# Altium PCB PCB2.PcbDoc (part 2 of 3)
Units mm, origin at the board's own origin, x right, y up, seen from the top; angles counter-clockwise.
Board outline 51.19 x 48.9 mm, 6 copper layers (Top Layer, Internal Plane 1, Signal Layer 3, Signal Layer 2, Internal Plane 2, Bottom Layer), stack 1.58 mm thick; 165 components, 90 nets, 480 pads, 1318 vias.
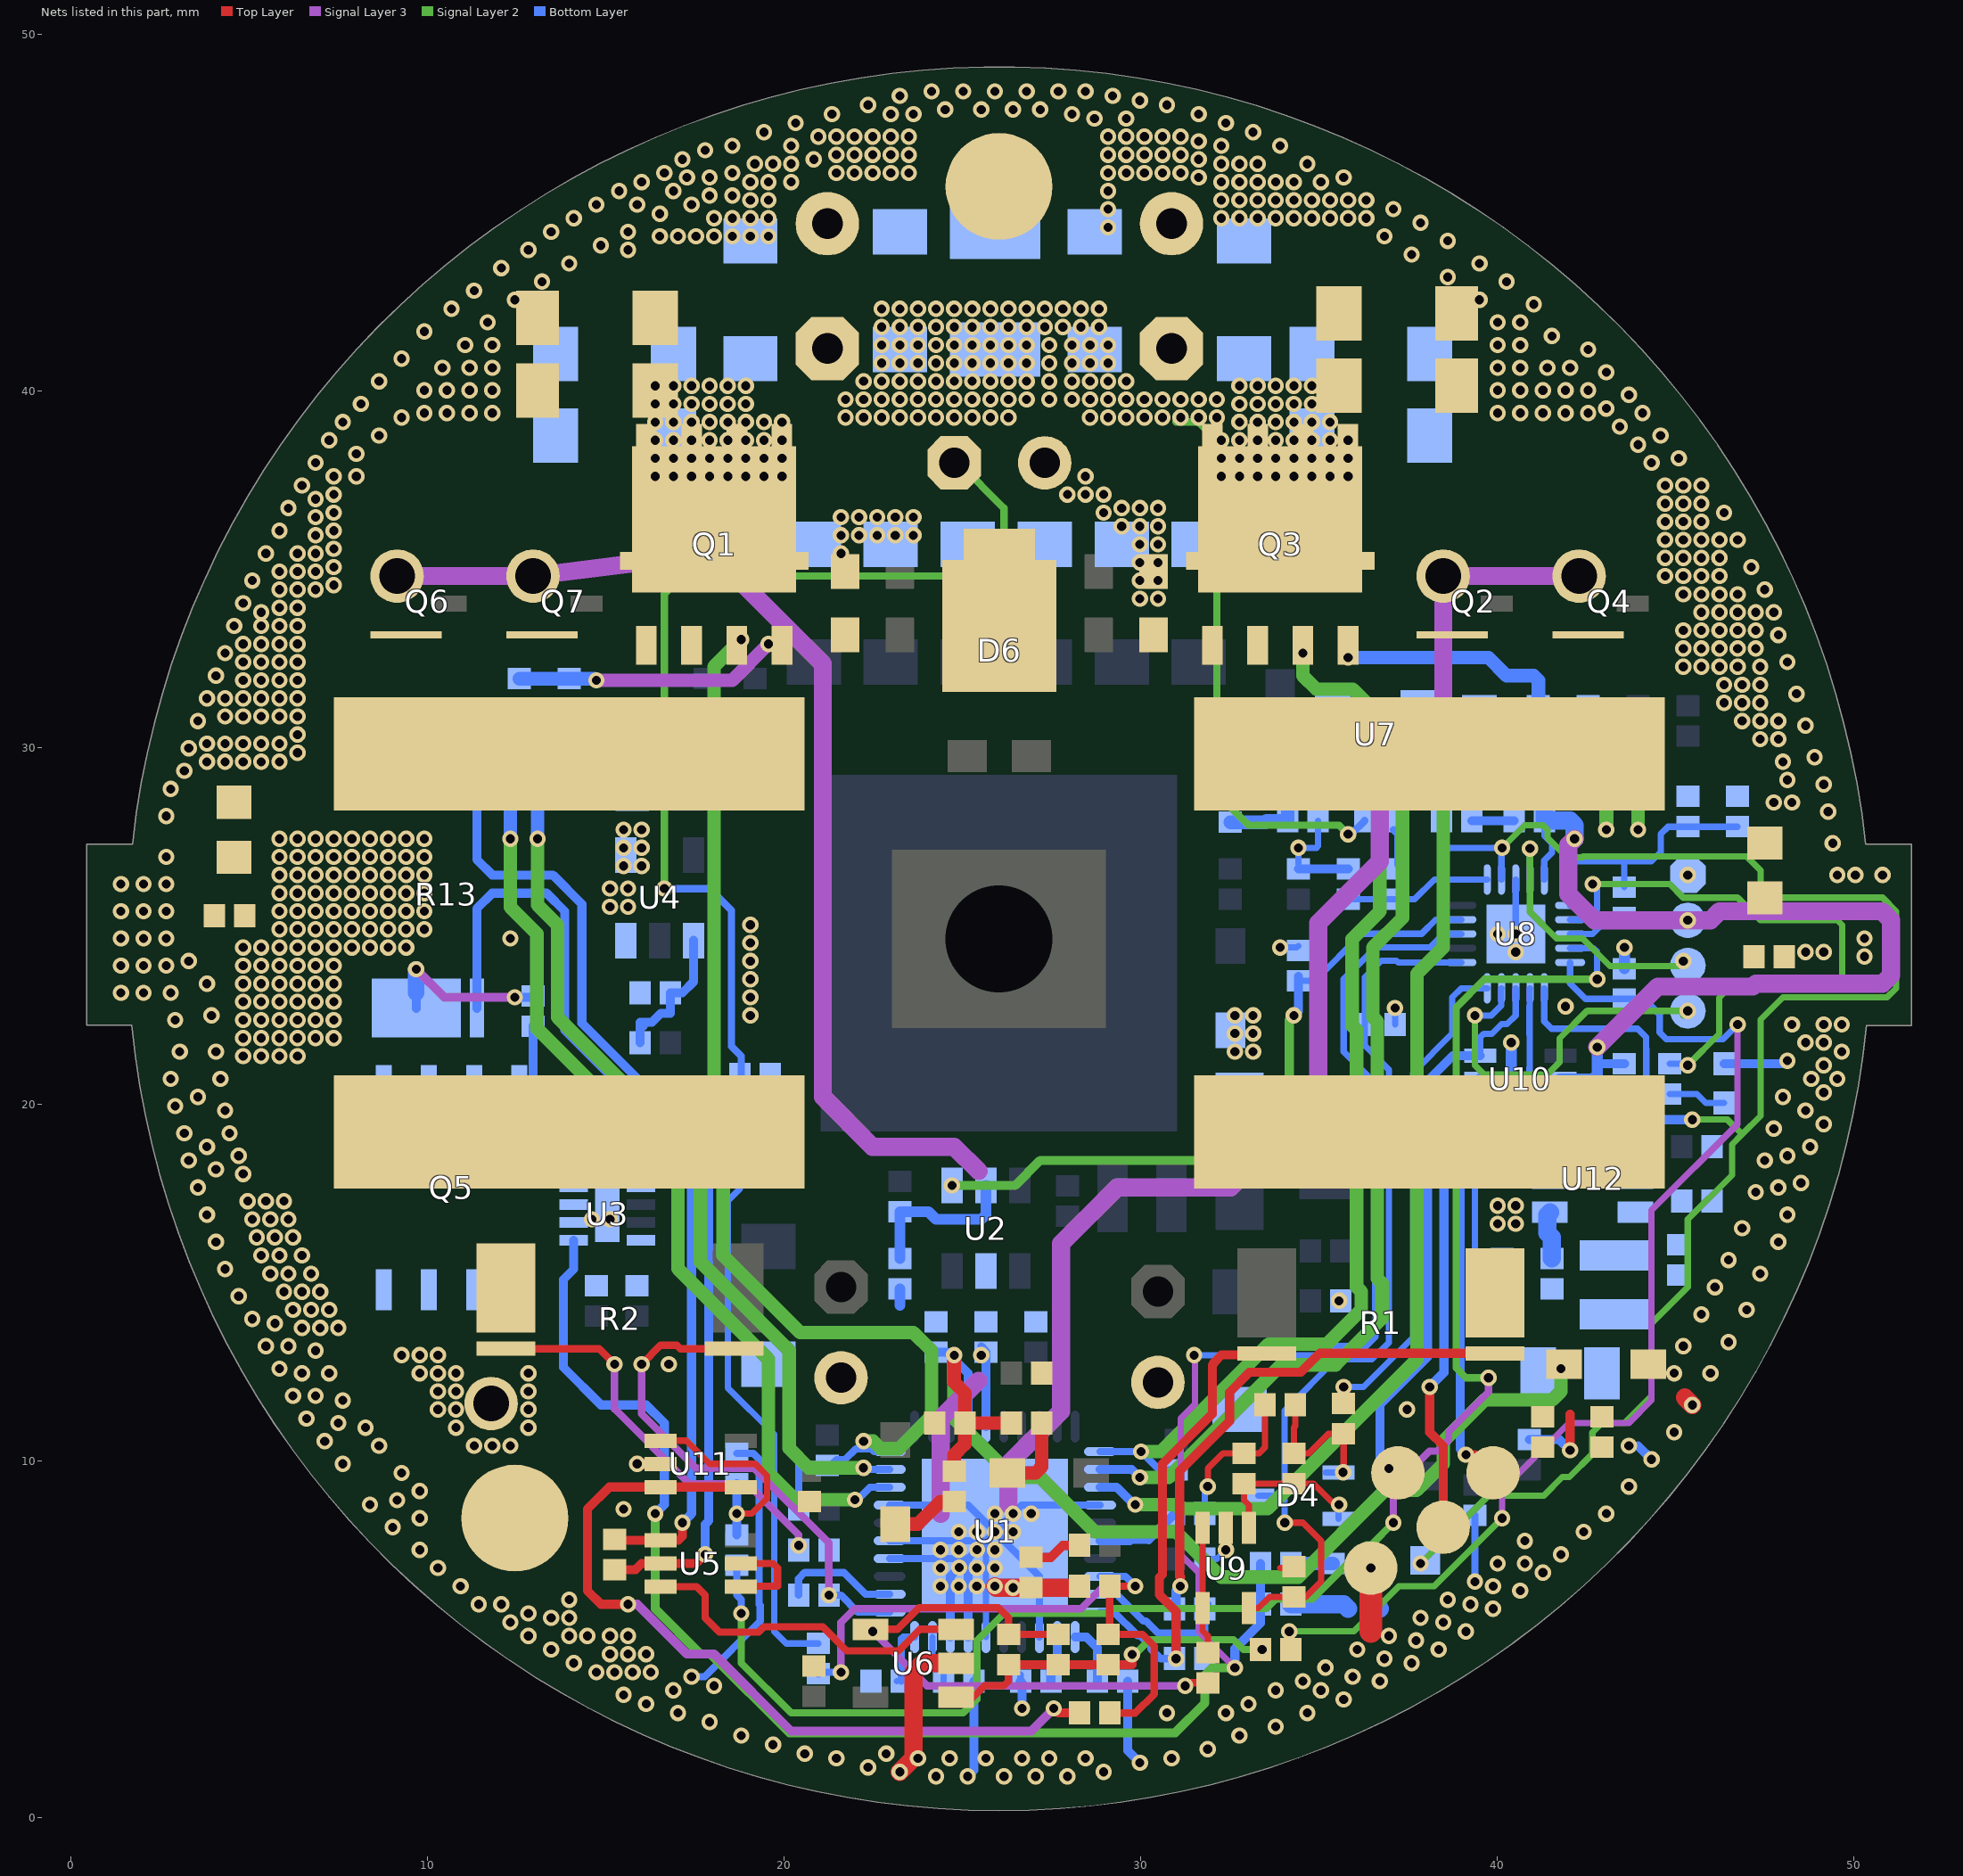
[diagram p6: the nets of this part, all layers, seen from the top]

## Via types
v1: diameter 0.457, hole 0.254, Top Layer to Bottom Layer, tented both sides, 1318 vias

## Nets (pads, with @x,y where several pads share a name; then routed paths per layer and width w, separated by ;. In a path a pad name is that pad's centre, name@x,y a point inside that pad or via, vN(x,y) a via of type N, cw(c..) or ccw(c..) an arc to the next point about the centre after c; other vN are vias at no path point) (continued)
DCDCRUN: D8.2 R18.1 U8.2 U12.4 | length 46.9
  Signal Layer 2 w0.178: v1(37.846,7.112) 39.751,9.017 41.305,9.017 41.823,9.534 42.016,9.534 42.663,10.181 42.663,10.786 42.926,11.049 43.561,11.049 44.323,11.811 44.323,13.843 45.339,14.859 45.339,16.764 46.579,18.004 46.579,18.863 46.863,19.147 ; v1@40.132,27.305 v1(40.132,27.178) 40.767,27.813 41.275,27.813 41.402,27.686 41.402,27.462 41.95,26.915 42.378,26.915 42.397,26.933 46.99,26.933 47.38,26.543 47.38,26.026 47.625,25.781 50.8,25.781 51.181,25.4 51.181,23.241 50.927,22.987 48.006,22.987 47.38,22.361 47.38,19.664 46.863,19.147 ; v1(45.466,19.558) 46.452,19.558 46.863,19.147
  Bottom Layer w0.178: R18.1@38.437,28.067 38.437,27.349 38.608,27.178 v1(40.132,27.178) 40.113,27.159 U8.2@40.113,26.29
  Bottom Layer w0.254: U12.4@43.872,18.857 43.872,19.361 44.069,19.558 v1(45.466,19.558)
DCEN: R19.2 U2.4 U8.19 | length 20
  Signal Layer 2 w0.254: v1(24.704,17.71) 26.473,17.71 27.178,18.415 33.655,18.415 34.163,18.923 34.163,22.352 v1(34.29,22.479)
  Bottom Layer w0.178: R19.2@34.417,23.451 34.881,23.451 36.198,24.768 37.875,24.768 38.272,25.165 U8.19@38.988,25.165
  Bottom Layer w0.254: v1(34.29,22.479) 34.417,22.606 R19.2@34.417,23.578
DRVCC: C15.2 C61.2 C63.2 C64.2 C71.2 C75.2 D10.2 L4.1 R48.2 R49.1 R50.2 R53.1 U1.24 | length 34.8
  Top Layer w0.254: v1(42.037,10.287) 42.037,11.303
  Top Layer w0.381: R48.2@24.765,9.696 24.765,10.16 25.063,10.458 C71.2@25.063,11.049 ; v1(24.765,12.954) 24.765,12.192 25.063,11.894 C71.2@25.063,11.049 ; R49.1@26.372,11.049 C71.2@25.063,11.049
  Signal Layer 2 w0.381: v1(24.765,12.954) 24.765,11.176 26.416,9.525 27.178,9.525 28.702,8.001 30.988,8.001 32.258,6.731 34.417,6.731 36.846,9.16 37.735,9.16 38.481,9.906 38.481,10.541 39.64,11.7 41.545,11.7 41.783,11.938 v1(41.783,12.573)
  Bottom Layer w0.178: 40.132,13.589 R50.2@40.132,14.815
  Bottom Layer w0.254: C61.2@24.257,13.037 24.567,13.037 25.158,12.446 U1.24@25.158,10.951 ; R53.1@40.894,10.585 41.739,10.585 v1(42.037,10.287)
DRVIN: C68.1 FB3.1 U12.5
DSCK: pad.0 U8.14 | length 10.1
  Signal Layer 2 w0.178: v1(39.37,22.479) 39.37,21.082 39.624,20.828 41.402,20.828 41.742,21.168 41.742,21.834 42.515,22.606 v1(45.339,22.606) v1@45.212,22.479
  Bottom Layer w0.178: v1(39.37,22.479) 39.827,22.479 40.102,22.754 40.102,23.229 U8.14@40.113,23.24
DSDA: pad.2@45.339,23.876 U8.4 | length 7.6
  Signal Layer 2 w0.178: v1(40.913,27.159) 40.913,25.381 41.656,24.638 42.388,24.638 43.159,23.867 45.076,23.867 v1(45.212,24.003)
  Bottom Layer w0.178: U8.4@40.913,26.29 v1(40.913,27.159)
DTCA: R39.1 U1.9 | length 1.4
  Bottom Layer w0.178: U1.9@24.158,5.051 24.158,4.544 24.467,4.235 R39.1@24.467,3.81
DTCB: R40.1 U1.10 | length 1.6
  Bottom Layer w0.203: R40.1@23.285,3.81 23.285,4.998 23.338,5.051 U1.10@23.658,5.051
FSW: R35.1 U1.1 | length 1.7
  Bottom Layer w0.254: U1.1@28.158,5.051 28.477,5.051 28.785,4.743 R35.1@28.785,3.81
GH1: Q3.4 R9.2 R10.2 | length 7.7
  Bottom Layer w0.381: v1(35.814,32.512) 39.751,32.512 40.259,32.004 41.021,32.004 41.148,31.877 R9.2@41.148,31.159 R10.2@42.545,31.159
GH2: Q1.4 R46.2 R47.2 | length 7.9
  Top Layer w0.381: v1(19.558,32.893) 19.583,32.868 Q1.4@20.026,32.868
  Signal Layer 3 w0.381: v1(14.732,31.877) 18.542,31.877 v1(19.558,32.893)
  Bottom Layer w0.381: R46.2@12.573,31.921 R47.2@13.97,31.921 14.688,31.921 v1(14.732,31.877)
GLED: pad.4@38.481,8.128 U8.12 U10.1 | length 17.3
  Top Layer w0.254: v1(38.1,12.065) 38.1,10.795 38.481,10.414 pad.4@38.481,8.128
  Bottom Layer w0.178: U10.1@39.515,20.051 40.371,20.051 40.899,20.579 40.899,21.021 40.903,21.025 40.903,21.931 40.899,21.936 40.899,22.751 40.902,22.754 40.902,23.229 U8.12@40.913,23.24
  Bottom Layer w0.254: v1(38.1,12.065) 38.5,12.465 38.5,19.577 38.974,20.051 U10.1@39.515,20.051
GND: C1.2 C2.2 C3.2 C4.2 C6.1 C8.1 C9.1 C11.1 C12.2 C13.1 C14.1 C15.1 C16.2 C17.1 C18.1 C19.1 C20.1 C21.1 C22.1 C23.1 C24.1 C25.1 C26.1 C27.1 C28.1 C29.1 C30.1 C31.1 C32.1 C34.1 C35.1 C36.1 C38.2 C39.1 C40.1 C41.1 C42.1 C43.1 C44.1 C45.1 C46.1 C47.1 C49.1 C51.1 C52.1 C53.1 C54.1 C55.2 C56.1 C57.1 C58.1 C59.2 C60.2 C61.1 C63.1 C64.1 C65.1 C66.1 C67.1 C68.2 C71.1 C72.1 C73.1 C74.2 C75.1 D3.1 D5.K D9.K D10.1 pad.2@9.144,34.798 pad.2@12.954,34.798 pad.2@38.481,34.798 pad.2@42.291,34.798 pad.2@45.339,26.416 pad.4@36.449,6.985 Q2.1 Q4.1 Q6.1 Q7.1 R5.2 R11.1 R13.0 R18.2 R19.1 R22.1 R23.1 R26.1 R30.1 R35.2 R39.2 R40.2 R51.1 R52.1 R55.1 U1.3 U1.6 U1.7 U1.8 U1.14 U1.15 U1.17 U1.34 U1.41 U2.2 U3.2 U3.3 U3.8 U3.9 U4.3 U4.4 U5.1 U5.2 U6.2 U7.3 U7.4 U8.3 U8.21 U9.2 U10.2 U11.2 U12.2 | length 144.3
  Top Layer w0.178: v1(31.877,9.271) 31.877,9.779 32.302,10.204 C45.1@32.893,10.204 33.318,10.204 33.484,10.37 C44.1@33.484,11.557 ; v1(32.385,7.493) U9.2@32.385,8.11 ; 33.909,6.985 34.246,6.985 C43.1@34.29,7.029
  Top Layer w0.203: U5.1@18.778,6.462 18.793,6.477 19.812,6.477 19.812,6.985 19.685,7.112 U5.2@18.778,7.112
  Top Layer w0.305: v1(15.875,9.906) U11.2@16.528,9.906
  Top Layer w0.508: v1(23.241,1.27) 23.622,1.651 23.622,4.064 23.876,4.318 U6.2@24.822,4.318 ; v1(25.908,6.477) 25.952,6.433 v1(26.416,6.433) C31.1@26.924,6.433 28.233,6.433 R11.1@28.277,6.477 ; 45.256,11.767 v1(45.466,11.557)
  Top Layer w0.635: 36.449,5.207 v1(36.449,6.985)
  Signal Layer 3 w0.508: pad.2@9.144,34.798 pad.2@12.954,34.798 17.983,35.433 21.082,32.334 21.082,20.193 22.479,18.796 24.765,18.796 25.448,18.113 ; 24.384,8.509 24.384,11.176 25.448,12.24 ; 26.289,8.763 26.289,9.906 27.765,11.382 27.765,16.081 29.337,17.653 32.512,17.653 34.973,20.114 34.973,25.067 36.703,26.797 36.703,28.956 38.481,30.734 pad.2@38.481,34.798 pad.2@42.291,34.798
  Bottom Layer w0.178: U1.6@25.658,5.051 U1.41@25.658,7.751 ; C17.1@31.794,7.239 32.131,7.239 v1(32.385,7.493) ; C18.1@31.794,8.509 31.794,9.188 v1(31.877,9.271) ; v1(33.909,24.384) 34.373,24.384 R19.1@34.417,24.428 ; R22.1@34.417,26.714 v1(34.417,27.178) 34.925,27.178 34.969,27.222 C40.1@34.969,27.94 ; R26.1@37.128,22.225 v1(37.128,22.689) ; v1(40.513,24.765) U8.3@40.513,26.29
  Bottom Layer w0.203: v1(17.399,3.937) 17.768,3.937 19.326,5.495 19.326,5.935 19.296,5.965 19.296,10.041 19.133,10.204 C56.1@18.669,10.204 ; C49.1@20.403,8.636 20.403,9.862 20.447,9.906 ; U1.14@22.958,7.251 25.158,7.251 v1(25.408,7.501) U1.41@25.658,7.751 ; U1.15@22.958,7.751 U1.41@25.658,7.751 ; U1.17@22.958,8.751 25.158,8.751 v1(25.908,8.001) ; U1.3@27.158,5.051 27.158,6.751 v1(25.908,8.001) ; U1.34@28.858,8.751 26.658,8.751 v1(26.416,8.509) v1(25.908,8.001) ; v1(39.37,6.604) R52.1@39.37,8.465 ; U1.41@25.658,7.751 v1(25.908,8.001)
  Bottom Layer w0.254: v1@22.308,1.441 v1(22.352,1.397) ; U1.8@24.658,5.051 24.658,6.751 U1.41@25.158,7.251 ; v1(25.146,1.143) 25.317,1.314 R39.2@25.317,3.81 ; U1.7@25.158,5.051 U1.41@25.158,6.985 ; R35.2@29.635,3.81 29.635,1.861 v1(29.972,1.524) ; R22.1@34.417,26.587 R23.1@35.814,26.587 ; R18.2@39.287,27.94 C41.1@40.469,27.94 ; 43.942,10.414 v1(44.323,10.033) ; D5.K@46.355,21.124 48.048,21.124 v1(48.133,21.209)
  Bottom Layer w0.305: C2.2@21.504,12.614 C2.2@21.885,12.614 ; 23.241,14.351 C6.1@23.241,14.815 ; U10.2@39.515,20.701 40.259,20.701 40.386,20.828 v1(40.386,21.717) ; C46.1@43.561,23.793 v1(43.561,24.384)
  Bottom Layer w0.508: R55.1@34.207,5.969 35.687,5.969 35.814,5.842 ; D9.K@36.491,7.112 36.491,6.054 36.703,5.842
  other v1: 24.257,1.143 26.162,1.143 27.051,1.143 27.94,1.143 28.956,1.27 21.463,1.651 23.749,1.651 24.638,1.651 25.654,1.651 26.67,1.651 27.432,1.651 28.448,1.651 30.861,1.651 20.574,1.778 22.86,1.778 31.877,1.905 19.685,2.032 18.796,2.286 32.766,2.286 33.782,2.54 17.907,2.667 17.018,2.921 30.734,2.921 32.385,2.921 34.671,2.921 16.129,3.175 33.02,3.175 35.687,3.302 15.494,3.429 16.891,3.556 33.782,3.556 35.052,3.556 18.034,3.683 34.544,3.81 36.703,3.81 35.941,3.937 14.732,4.064 15.24,4.064 15.748,4.064 16.256,4.064 35.179,4.191 14.097,4.318 37.592,4.318 36.83,4.445 15.113,4.572 15.621,4.572 16.129,4.572 13.462,4.699 36.068,4.699 38.354,4.699 37.719,4.953 12.827,5.08 13.97,5.08 14.478,5.08 15.113,5.08 15.621,5.08 36.957,5.08 39.116,5.207 12.319,5.461 38.481,5.461 13.462,5.588 13.97,5.588 37.846,5.588 12.827,5.715 39.878,5.842 11.43,5.969 12.065,5.969 39.243,5.969 13.97,6.096 38.608,6.096 40.64,6.35 10.922,6.477 24.384,6.477 24.892,6.477 25.4,6.477 39.878,6.477 41.275,6.858 10.287,6.985 24.384,6.985 25.4,6.985 25.908,6.985 24.908,7.001 40.005,7.112 40.767,7.112 41.783,7.366 9.779,7.493 24.384,7.493 24.892,7.493 25.908,7.493 40.767,7.747 24.892,8.001 25.4,8.001 26.416,8.001 42.418,8.001 9.017,8.128 9.779,8.382 25.908,8.509 26.924,8.509 43.053,8.509 15.494,8.636 8.382,8.763 9.144,8.89 9.779,9.144 43.688,9.271 9.271,9.652 7.62,9.906 8.636,10.414 43.688,10.414 7.112,10.541 44.958,10.795 8.255,10.922 7.493,11.049 6.604,11.176 37.465,11.43 7.62,11.684 6.223,11.811 6.858,11.811 6.477,12.446 7.239,12.446 44.958,12.446 45.974,12.446 5.842,12.573 16.764,12.7 6.858,13.081 5.461,13.208 6.096,13.208 45.212,13.208 46.482,13.318 6.477,13.716 6.985,13.716 7.493,13.716 5.715,13.843 5.08,13.97 45.72,14.097 6.223,14.224 6.731,14.224 7.239,14.224 46.99,14.224 35.56,14.478 4.699,14.605 5.969,14.732 6.477,14.732 6.985,14.732 46.101,14.859 5.588,15.24 6.096,15.24 6.731,15.24 47.371,15.24 4.318,15.367 46.482,15.621 5.334,15.748 5.842,15.748 6.477,15.748 4.064,16.129 47.879,16.129 5.207,16.256 5.715,16.256 6.223,16.256 46.863,16.51 40.005,16.637 40.513,16.637 5.08,16.764 5.588,16.764 6.096,16.764 14.605,16.764 15.113,16.764 3.81,16.891 48.133,16.891 40.005,17.145 40.513,17.145 4.953,17.272 5.461,17.272 5.969,17.272 47.244,17.526 3.556,17.653 47.879,17.653 48.514,17.78 4.826,18.034 4.064,18.161 3.302,18.415 47.498,18.415 4.699,18.542 48.133,18.542 3.81,18.796 48.768,18.796 3.175,19.177 4.445,19.177 47.752,19.304 49.149,19.431 4.318,19.812 48.641,19.812 2.921,19.939 3.556,20.193 48.006,20.193 49.149,20.32 2.794,20.701 4.191,20.701 48.8,20.701 49.53,20.701 49.149,21.082 4.826,21.336 5.334,21.336 5.842,21.336 6.35,21.336 3.048,21.463 4.064,21.463 32.639,21.463 33.147,21.463 49.657,21.463 48.641,21.717 49.149,21.717 4.826,21.844 5.334,21.844 5.842,21.844 6.35,21.844 6.858,21.844 7.366,21.844 32.639,21.971 33.147,21.971 48.26,22.225 49.149,22.225 49.657,22.225 2.921,22.352 4.826,22.352 5.334,22.352 5.842,22.352 6.35,22.352 6.858,22.352 7.366,22.352 3.937,22.479 19.05,22.479 32.639,22.479 33.147,22.479 41.91,22.733 4.826,22.86 5.334,22.86 5.842,22.86 6.35,22.86 6.858,22.86 7.366,22.86 19.05,22.987 1.397,23.114 2.032,23.114 2.794,23.114 3.81,23.368 4.826,23.368 5.334,23.368 5.842,23.368 6.35,23.368 6.858,23.368 7.366,23.368 19.05,23.495 1.397,23.876 2.032,23.876 2.667,23.876 4.826,23.876 5.334,23.876 5.842,23.876 6.35,23.876 6.858,23.876 7.366,23.876 3.302,24.003 19.05,24.003 50.292,24.13 40.513,24.257 48.641,24.257 49.149,24.257 4.826,24.384 5.334,24.384 5.842,24.384 6.35,24.384 6.858,24.384 7.366,24.384 7.874,24.384 8.382,24.384 8.89,24.384 9.398,24.384 19.05,24.511 1.397,24.638 2.032,24.638 2.667,24.638 12.319,24.638 50.292,24.638 40.005,24.765 5.842,24.892 6.35,24.892 6.858,24.892 7.366,24.892 7.874,24.892 8.382,24.892 8.89,24.892 9.398,24.892 9.906,24.892 19.05,25.019 1.397,25.4 2.032,25.4 2.667,25.4 5.842,25.4 6.35,25.4 6.858,25.4 7.366,25.4 7.874,25.4 8.382,25.4 8.89,25.4 9.398,25.4 9.906,25.4 15.113,25.527 15.621,25.527 5.842,25.908 6.35,25.908 6.858,25.908 7.366,25.908 7.874,25.908 8.382,25.908 8.89,25.908 9.398,25.908 9.906,25.908 15.113,26.035 15.621,26.035 1.397,26.162 2.032,26.162 2.667,26.162 5.842,26.416 6.35,26.416 6.858,26.416 7.366,26.416 7.874,26.416 8.382,26.416 8.89,26.416 9.398,26.416 9.906,26.416 45.339,26.416 49.53,26.416 50.038,26.416 50.8,26.416 15.494,26.67 16.002,26.67 2.667,26.924 5.842,26.924 6.35,26.924 6.858,26.924 7.366,26.924 7.874,26.924 8.382,26.924 8.89,26.924 9.398,26.924 9.906,26.924 15.494,27.178 16.002,27.178 49.403,27.305 5.842,27.432 6.35,27.432 6.858,27.432 7.366,27.432 7.874,27.432 8.382,27.432 8.89,27.432 9.398,27.432 9.906,27.432 15.494,27.686 16.002,27.686 2.667,28.067 49.276,28.194 47.752,28.448 48.26,28.448 2.794,28.829 49.149,28.956 48.133,29.083 3.175,29.337 3.81,29.591 4.318,29.591 4.826,29.591 5.334,29.591 5.842,29.591 48.006,29.591 48.895,29.718 6.35,29.845 3.302,29.972 3.81,30.099 4.318,30.099 4.826,30.099 5.334,30.099 5.842,30.099 47.371,30.226 47.879,30.226 6.35,30.353 48.641,30.607 3.556,30.734 46.863,30.734 47.371,30.734 47.879,30.734 4.318,30.861 4.826,30.861 5.334,30.861 5.842,30.861 6.35,30.861 46.355,31.242 46.863,31.242 47.371,31.242 3.81,31.369 4.318,31.369 4.826,31.369 5.334,31.369 5.842,31.369 6.35,31.369 48.387,31.496 46.355,31.75 46.863,31.75 47.371,31.75 4.826,31.877 5.334,31.877 5.842,31.877 6.35,31.877 4.064,32.004 45.212,32.258 45.72,32.258 46.228,32.258 46.736,32.258 47.371,32.258 4.826,32.385 5.334,32.385 5.842,32.385 6.35,32.385 48.133,32.385 4.318,32.639 45.212,32.766 45.72,32.766 46.228,32.766 46.736,32.766 47.244,32.766 4.826,32.893 5.334,32.893 5.842,32.893 6.35,32.893 47.879,33.147 45.212,33.274 45.72,33.274 46.228,33.274 46.736,33.274 47.244,33.274 4.572,33.401 5.334,33.401 5.842,33.401 6.35,33.401 5.334,33.782 45.72,33.782 46.228,33.782 46.736,33.782 47.244,33.782 47.752,33.782 5.842,33.909 6.35,33.909 4.826,34.036 29.972,34.163 30.48,34.163 45.212,34.29 45.72,34.29 46.228,34.29 46.736,34.29 5.842,34.417 6.35,34.417 6.858,34.417 47.498,34.417 7.366,34.544 5.08,34.671 29.972,34.671 30.48,34.671 44.704,34.798 45.212,34.798 45.72,34.798 46.228,34.798 5.842,34.925 6.35,34.925 6.858,34.925 7.366,35.052 47.117,35.052 29.972,35.179 30.48,35.179 44.704,35.306 45.212,35.306 45.72,35.306 46.228,35.306 5.461,35.433 6.35,35.433 6.858,35.433 21.59,35.433 7.366,35.56 29.972,35.687 30.48,35.687 44.704,35.814 45.212,35.814 45.72,35.814 46.228,35.814 46.736,35.814 6.858,35.941 21.59,35.941 22.098,35.941 22.606,35.941 23.114,35.941 23.622,35.941 5.842,36.068 7.366,36.068 29.464,36.195 29.972,36.195 30.48,36.195 44.704,36.322 45.212,36.322 45.72,36.322 6.858,36.449 21.59,36.449 22.098,36.449 22.606,36.449 23.114,36.449 23.622,36.449 7.366,36.576 28.956,36.576 46.355,36.576 6.096,36.703 29.464,36.703 29.972,36.703 30.48,36.703 44.704,36.83 45.212,36.83 45.72,36.83 6.858,36.957 7.366,37.084 27.94,37.084 28.448,37.084 28.956,37.084 6.477,37.338 44.704,37.338 45.212,37.338 45.72,37.338 7.366,37.592 8.001,37.592 28.448,37.592 6.858,37.973 44.323,37.973 45.085,38.1 8.001,38.227 43.942,38.481 7.239,38.608 8.636,38.735 44.577,38.735 43.434,38.989 7.62,39.116 9.271,39.243 9.906,39.37 10.541,39.37 11.176,39.37 11.811,39.37 40.005,39.37 40.64,39.37 41.275,39.37 41.91,39.37 42.545,39.37 44.069,39.37 43.053,39.497 8.128,39.624 43.688,39.878 9.906,40.005 10.541,40.005 11.176,40.005 11.811,40.005 40.005,40.005 40.64,40.005 41.275,40.005 41.91,40.005 42.545,40.005 8.636,40.259 43.053,40.513 10.414,40.64 11.176,40.64 11.811,40.64 40.005,40.64 40.64,40.64 41.402,40.64 42.037,40.64 9.271,40.894 42.545,41.148 11.049,41.275 11.811,41.275 40.005,41.275 40.64,41.275 41.529,41.529 9.906,41.656 11.684,41.91 40.005,41.91 40.64,41.91 10.668,42.291 41.021,42.418 12.446,42.545 39.497,42.545 11.303,42.799 13.208,43.053 40.259,43.053 38.608,43.18 12.065,43.434 13.97,43.561 39.497,43.561 37.592,43.815 12.827,43.942 15.621,43.942 14.859,44.069 38.608,44.196 16.51,44.323 17.018,44.323 17.526,44.323 18.034,44.323 18.542,44.323 19.05,44.323 19.558,44.323 36.83,44.323 13.462,44.45 15.621,44.45 29.083,44.577 37.846,44.704 14.097,44.831 18.034,44.831 18.542,44.831 19.05,44.831 19.558,44.831 32.258,44.831 32.766,44.831 33.274,44.831 33.782,44.831 34.29,44.831 34.798,44.831 35.306,44.831 35.814,44.831 36.322,44.831 16.51,44.958 29.083,45.085 37.084,45.085 14.732,45.212 15.875,45.212 17.399,45.212 19.05,45.339 19.558,45.339 32.258,45.339 32.766,45.339 33.274,45.339 33.782,45.339 34.29,45.339 34.798,45.339 35.306,45.339 35.814,45.339 36.322,45.339 17.907,45.466 18.542,45.466 15.367,45.593 16.891,45.593 29.083,45.593 16.002,45.847 19.05,45.847 19.558,45.847 20.193,45.847 32.258,45.847 32.766,45.847 33.274,45.847 33.782,45.847 34.29,45.847 35.052,45.847 17.272,45.974 17.907,45.974 31.623,45.974 35.687,45.974 16.637,46.101 18.542,46.101 21.463,46.101 21.971,46.101 22.479,46.101 22.987,46.101 23.495,46.101 29.083,46.101 29.591,46.101 30.099,46.101 30.607,46.101 31.115,46.101 19.177,46.355 19.685,46.355 20.193,46.355 32.258,46.355 32.766,46.355 33.274,46.355 34.671,46.355 17.145,46.482 20.828,46.482 31.623,46.482 21.463,46.609 21.971,46.609 22.479,46.609 22.987,46.609 23.495,46.609 29.083,46.609 29.591,46.609 30.099,46.609 30.607,46.609 31.115,46.609 17.78,46.736 18.542,46.863 20.193,46.863 32.258,46.863 33.909,46.863 31.623,46.99 20.955,47.117 21.463,47.117 21.971,47.117 22.479,47.117 22.987,47.117 23.495,47.117 29.083,47.117 29.591,47.117 30.099,47.117 30.607,47.117 31.115,47.117 19.431,47.244 33.147,47.244 20.32,47.498 32.385,47.498 28.702,47.625 29.591,47.625 21.336,47.752 22.987,47.752 23.622,47.752 28.067,47.752 31.623,47.752 24.511,47.879 25.527,47.879 26.416,47.879 27.178,47.879 22.352,48.006 30.734,48.006 29.972,48.133 23.241,48.26 29.21,48.26 24.13,48.387 25.019,48.387 25.908,48.387 26.797,48.387 27.686,48.387 28.448,48.387
HPATH: Q5.1 Q5.2 Q5.3 R12.2 R13.1 | length 4.7
  Signal Layer 3 w0.254: v1(9.679,23.776) 10.468,22.987 v1(12.446,22.987)
  Bottom Layer w0.254: R13.1@9.679,22.682 R13.1@9.679,23.114 ; v1(12.446,22.987) 12.91,22.987 R12.2@12.954,23.031
  Bottom Layer w0.457: R13.1@9.679,23.114 v1(9.679,23.776)
ILED: U5.6 U6.3 | length 9.8
  Top Layer w0.203: U5.6@16.528,6.462 17.541,6.462 17.78,6.223 17.78,5.588 18.183,5.185 19.282,5.185 19.431,5.334 21.082,5.334 21.75,4.666 23.208,4.666 23.81,5.268 U6.3@24.822,5.268
INJ: R14.1 U11.3 U11.4 | length 22.6
  Top Layer w0.254: v1(15.621,5.969) 14.859,5.969 14.478,6.35 14.478,8.636 15.098,9.256 U11.3@16.528,9.256 U11.4@18.778,9.256 ; v1(27.559,3.048) 27.686,2.921 R14.1@28.277,2.921
  Signal Layer 3 w0.254: v1(15.621,5.969) 15.875,5.969 17.272,4.572 18.034,4.572 20.193,2.413 26.924,2.413 v1(27.559,3.048)
INTVCC: C9.2 R38.2 U1.25 | length 3.3
  Bottom Layer w0.178: R38.2@26.626,3.81 R38.2@26.626,3.994
  Bottom Layer w0.203: C9.2@25.527,13.208 25.658,13.077 C9.2@25.658,13.037
  Bottom Layer w0.254: C9.2@25.654,13.037 25.654,10.955 U1.25@25.658,10.951 ; R38.2@26.626,3.81 26.67,3.766 v1(26.67,3.048)
  other v1: 25.527,12.954
IS1_N: R1.3 R7.2 | length 14.7
  Top Layer w0.254: v1(31.106,6.477) 31.106,6.722 31.115,6.731 31.09,6.756 31.09,9.706 32.487,11.103 32.487,11.913 33.052,12.478 34.488,12.478 35.015,13.005 R1.3@39.929,13.005
  Bottom Layer w0.254: R7.2@30.988,5.715 30.988,6.35 31.106,6.468 v1(31.106,6.477)
IS1_P: C7.2 R1.2 U1.40 | length 13.4
  Top Layer w0.254: v1(30.988,4.445) 30.988,5.769 30.522,6.235 30.522,6.719 30.607,6.804 30.607,9.906 32.004,11.303 32.004,12.676 32.052,12.724 32.052,12.748 32.265,12.961 33.484,12.961 R1.2@33.528,13.005
  Bottom Layer w0.208: U1.40@28.858,5.751 29.248,5.751 29.902,5.096 29.974,5.096 30.286,4.784 30.286,4.712 30.554,4.445 v1(30.988,4.445)
IS2_N: R2.2 R43.2 | length 11.4
  Top Layer w0.208: R2.2@12.192,13.132 14.808,13.132 v1(15.24,12.7)
  Signal Layer 3 w0.208: v1(15.24,12.7) 15.24,11.448 17.345,9.342 18.979,9.342 20.403,7.918 v1(20.403,7.62)
  Signal Layer 2 w0.208: v1@15.24,12.668 v1(15.24,12.7)
IS2_P: C48.2 R2.3 U1.11 | length 14.4
  Top Layer w0.208: v1(16.002,12.7) 16.535,13.233 16.985,13.233 17.085,13.132 R2.3@18.593,13.132
  Signal Layer 3 w0.208: v1(16.002,12.7) 16.002,11.303 17.526,9.779 19.159,9.779 21.253,7.685 v1(21.253,6.223)
  Bottom Layer w0.208: v1(21.253,6.223) 21.59,6.223 22.062,5.751 U1.11@22.958,5.751
KEY: pad.4@39.878,9.652 R27.1 U8.11 U10.6 | length 21.1
  Top Layer w0.254: v1(39.116,10.16) 39.37,10.16 pad.4@39.878,9.652
  Bottom Layer w0.178: U8.11@41.313,23.24 41.313,22.314 41.52,22.107 43.933,22.107 44.172,21.868 44.172,21.548 44.175,21.546 44.175,20.706 44.172,20.704 44.172,20.423 44.025,20.276 R27.1@43.561,20.276 43.561,20.26 42.866,20.26 42.657,20.051 U10.6@41.765,20.051
  Bottom Layer w0.254: v1(39.116,10.16) 38.954,10.322 38.954,18.968 39.51,19.524 40.479,19.524 41.006,20.051 U10.6@41.765,20.051
LARGEIS_N: C70.2 R13.2 U5.5 | length 28
  Top Layer w0.254: C70.2@15.367,6.941 15.831,6.941 16.002,7.112 U5.5@16.528,7.112 17.526,7.112 v1(17.78,7.366)
  Bottom Layer w0.254: R13.2@11.379,29.083 11.379,26.848 11.811,26.416 13.509,26.416 14.326,25.6 14.326,22.262 17.882,18.706 17.882,15.93 17.872,15.92 17.872,15.576 17.882,15.566 17.882,8.309 17.78,8.208 v1(17.78,7.366)
LARGEIS_P: C70.1 R13.3 U5.4 | length 26.6
  Top Layer w0.254: C70.1@15.367,7.791 15.396,7.762 U5.4@16.528,7.762 17.033,7.762 17.145,7.874 v1(17.145,8.255)
  Bottom Layer w0.254: R13.3@11.379,22.682 11.379,25.476 11.811,25.908 13.335,25.908 13.843,25.4 13.843,22.062 17.399,18.506 17.399,8.509 v1(17.145,8.255)
LARGESEL: R54.2 R55.2 U3.1 U8.18 | length 63.7
  Signal Layer 3 w0.178: v1(31.496,12.954) 31.519,12.931 31.519,11.58 31.115,11.176 31.115,7.366 31.624,6.857 31.624,5.97 31.618,5.964 31.618,5.207 v1(32.636,4.188)
  Signal Layer 2 w0.254: v1(16.383,8.509) 16.383,5.842 17.653,4.572 17.936,4.572 20.142,2.365 30.964,2.365 31.798,3.199 31.798,3.985 32.001,4.188 v1(32.636,4.188)
  Bottom Layer w0.178: v1(31.496,12.954) 35.056,12.954 35.316,13.214 36.328,13.214 36.576,13.462 36.576,20.574 35.689,21.461 35.689,23.493 36.586,24.39 38.106,24.39 38.481,24.765 U8.18@38.988,24.765
  Bottom Layer w0.254: U3.1@14.093,16.175 14.093,15.363 13.805,15.075 13.805,12.611 14.859,11.557 16.129,11.557 16.637,11.049 16.637,8.763 v1(16.383,8.509) ; v1(32.636,4.188) 32.636,4.72 33.357,5.441 R54.2@33.357,7.112
LED-: pad.2@11.778,11.599 pad.6@12.446,8.382 Q5.5 Q5.6 Q5.7 Q5.8
  other v1: 11.303,10.414 11.811,10.414 12.319,10.414 10.795,10.922 12.827,10.922 10.287,11.43 10.795,11.43 12.827,11.43 10.287,11.938 10.795,11.938 12.827,11.938 9.779,12.446 10.287,12.446 10.795,12.446 12.827,12.446 9.271,12.954 9.779,12.954 10.287,12.954
LX1: C10.2 L1.2 Q2.3 Q3.1 Q3.2 Q3.3 Q4.3 R36.1 U1.31 | length 30.5
  Signal Layer 2 w0.381: v1(30.008,10.251) 30.571,10.251 33.585,13.265 35.223,13.265 36.179,14.222 36.179,14.734 36.052,14.861 36.052,22.068 35.928,22.192 35.928,24.625 36.703,25.4 36.703,30.861 35.941,31.623 34.925,31.623 34.544,32.004 v1(34.544,32.639)
  Bottom Layer w0.203: U1.31@28.858,10.251 v1(30.008,10.251) 30.524,9.735 C10.2@30.988,9.735
LX2: C62.2 L2.2 Q1.1 Q1.2 Q1.3 Q6.3 Q7.3 R37.1 U1.20 | length 31.1
  Signal Layer 2 w0.381: v1(18.796,33.02) 18.034,32.258 18.034,20.193 18.288,19.939 18.288,15.748 20.447,13.589 23.622,13.589 24.13,13.081 24.13,11.247 23.214,10.332 22.702,10.332 22.492,10.541 v1(22.225,10.541)
  Bottom Layer w0.203: C62.2@21.209,9.862 21.352,9.862 21.352,9.908 21.465,10.021 21.7,10.021 22.003,10.325 v1@22.225,10.325 ; v1(22.225,10.541) v1@22.225,10.325 ; U1.20@22.958,10.251 22.516,10.251 22.443,10.325 v1@22.225,10.325
MCU5V: C39.2 C41.2 pad.1 R27.2 U7.5 U8.5 U10.5 | length 32.1
  Signal Layer 3 w0.508: v1(42.164,27.432) 41.989,27.257 41.989,25.879 42.723,25.146 v1(45.339,25.146) 45.974,25.146 46.228,25.4 50.783,25.4 51.037,25.146 51.037,23.605 50.8,23.368 47.244,23.368 47.165,23.289 44.498,23.289 v1(42.799,21.59)
  Bottom Layer w0.178: U8.5@41.313,26.29 41.313,26.827 41.529,27.043 41.529,27.305 41.319,27.515 C41.2@41.319,27.94
  Bottom Layer w0.254: 42.799,21.209 42.882,21.126 R27.2@43.561,21.126
  Bottom Layer w0.305: U10.5@41.765,20.701 42.672,20.701 42.799,20.828 42.799,21.209 v1(42.799,21.59)
  Bottom Layer w0.508: U7.5@37.776,29.456 40.521,29.456 41.319,28.658 C41.2@41.319,27.94 42.037,27.94 42.164,27.813 v1(42.164,27.432)
MODE: R38.1 U1.2 | length 1.3
  Bottom Layer w0.254: R38.1@27.476,3.81 27.476,4.235 27.658,4.417 U1.2@27.658,5.051
MOSG: Q5.4 R12.1 U3.4 U3.5 | length 1.8
  Bottom Layer w0.254: R12.1@12.954,22.181 12.954,20.574 13.081,20.447
NetC6_2: C6.2 R3.1 U2.5 | length 4.7
  Bottom Layer w0.305: C6.2@23.241,15.665 R3.1@23.241,16.974 24.047,16.974 24.257,16.764 25.527,16.764 25.654,16.891 U2.5@25.654,17.71
NetC31_2: C31.2 R33.1 | length 1.5
  Top Layer w0.254: C31.2@26.924,7.283 27.476,7.283 27.813,7.62 R33.1@28.277,7.62
NetC33_2: C33.2 R41.1 R42.2 | length 16.3
  Bottom Layer w0.178: R42.2@18.752,18.034 18.752,17.609 18.415,17.272 18.415,12.037 19.717,10.736 19.717,5.207 20.054,4.87 R41.1@20.955,4.87
  Bottom Layer w0.254: R42.2@18.752,18.034 C33.2@18.752,19.431
NetC35_2: C35.2 FB1.2 U4.1 | length 4.1
  Bottom Layer w0.254: FB1.2@15.958,21.717 15.958,22.291 ; 16.04,22.18 16.04,22.239 15.988,22.291 16.295,22.291 16.544,22.54 16.808,22.54 C35.2@16.808,23.114 17.145,23.114 17.46,23.429 U4.1@17.46,24.581
NetC37_1: C37.1 R15.2 R16.1 U6.4 | length 16.2
  Top Layer w0.208: U6.4@22.422,5.268 23.175,5.268 23.782,5.875 26.002,5.875 26.289,5.588 R16.1@26.289,5.124 C37.1@27.686,5.124 ; v1(31.242,3.683) 31.325,3.766 R15.2@31.877,3.766
  Signal Layer 3 w0.208: v1(22.479,5.207) 24.003,3.683 v1(31.242,3.683)
NetC40_2: C40.2 FB2.2 U7.1 | length 4.2
  Bottom Layer w0.381: FB2.2@32.512,27.896 33.484,27.896 33.528,27.94 C40.2@34.119,27.94 34.119,28.586 34.163,28.63 34.482,28.63 ; 34.508,28.656 35.179,28.656 35.376,28.853 U7.1@35.376,29.403
NetC44_2: C44.2 D4.1 R24.2 R25.1 | length 4.6
  Top Layer w0.178: C44.2@34.334,11.557 34.334,10.966 34.29,10.922 R25.1@34.29,10.204 34.715,10.204 35.262,10.751 R24.2@35.687,10.751 v1@35.687,9.682
  Bottom Layer w0.178: D4.1@35.179,9.667 v1(35.672,9.667)
NetC45_2: C45.2 D4.2 R25.2 U9.1 | length 4.6
  Top Layer w0.178: U9.1@33.035,8.11 33.035,8.748 32.893,8.89 C45.2@32.893,9.354 R25.2@34.29,9.354 34.842,9.354 35.433,8.763 v1(35.56,8.763)
  Bottom Layer w0.178: D4.2@35.542,8.367 35.542,8.745 v1(35.56,8.763)
NetC56_2: C56.2 R32.1 U11.1 | length 6.5
  Top Layer w0.178: U11.1@16.528,10.556 17.257,10.556 17.907,9.906 19.187,9.906 19.517,9.576 19.517,8.936 19.09,8.509 v1(18.669,8.509)
  Bottom Layer w0.254: R32.1@18.669,7.918 C56.2@18.669,9.354
NetC59_1: C59.1 R36.2
NetC60_1: C60.1 R37.2
NetD1_1: D1.1 R49.2 | length 2.3
  Top Layer w0.381: D1.1@26.252,9.652 27.051,9.652 27.222,9.823 R49.2@27.222,11.049
NetD2_1: D2.1 R48.1 | length 1.9
  Top Layer w0.381: D2.1@23.114,8.218 23.749,8.218 24.377,8.846 R48.1@24.765,8.846
NetD5_A: D5.A R31.1 | length 1.6
  Bottom Layer w0.178: R31.1@44.831,20.276 45.59,20.276 45.842,20.024 D5.A@46.355,20.024
NetD7_2: D7.2 FB2.1 | length 2
  Bottom Layer w0.381: FB2.1@32.512,28.746 32.512,29.21 32.729,29.427 D7.2@33.909,29.427
NetD9_A: D9.A R54.1 | length 1.2
  Bottom Layer w0.381: R54.1@34.207,7.112 D9.A@35.391,7.112
NetL1_1: L1.1 R1.1
NetL2_1: L2.1 R2.0
NetR21_2: R21.2 R34.1 | length 1
  Bottom Layer w0.208: R34.1@37.084,27.686 37.211,27.559 R21.2@37.211,26.714
OPOUT: C37.2 R16.2 R17.1 R28.1 U6.1 | length 9.8
  Top Layer w0.203: U6.1@24.822,3.368 25.308,3.368 25.623,3.683 26.162,3.683 26.289,3.81 R16.2@26.289,4.274
  Top Layer w0.254: R16.2@26.289,4.274 C37.2@27.686,4.274 R17.1@29.083,4.274 29.754,4.274 v1(29.754,4.564)
  Signal Layer 2 w0.203: v1(29.754,4.564) 29.837,4.564 29.845,4.572 30.248,4.975 32.599,4.975 32.876,4.699 v1(33.401,4.699)
OPVCC: C43.2 D4.3 R26.2 U8.16 U9.5 | length 25.5
  Top Layer w0.178: U9.5@33.035,5.86 33.292,5.86 33.611,6.179 C43.2@34.29,6.179 34.627,6.179 35.052,6.604 35.052,7.747 34.544,8.255 34.29,8.255
  Bottom Layer w0.178: D4.3@33.292,9.017 34.036,9.017 ; v1(34.036,8.255) 34.036,9.017 ; U8.16@38.988,23.965 37.219,23.965 37.171,24.012 36.743,24.012 36.278,23.548 R26.2@36.278,22.225 36.278,21.634 36.954,20.958 36.954,13.306 36.485,12.836 35.473,12.836 34.036,11.4 34.036,9.017
OUTFB: R21.1 R23.2 U8.1 | length 4.1
  Bottom Layer w0.178: R23.2@35.814,25.737 R21.1@37.211,25.737 37.675,25.737 38.228,26.29 U8.1@39.713,26.29
PRECHARGEEN: R32.2 U8.9 | length 46.9
  Signal Layer 3 w0.203: v1(37.084,8.255) 37.084,9.156 37.487,9.559 37.487,9.662 38.09,10.265 38.32,10.265 38.63,10.575 38.63,10.805 39.751,11.926 v1(39.751,12.319)
  Signal Layer 2 w0.203: v1(18.796,5.715) 18.796,4.318 20.193,2.921 25.019,2.921 25.4,3.302 25.4,4.953 26.162,5.715 29.039,5.715 29.175,5.851 33.523,5.851 33.787,6.115 34.803,6.115 36.327,7.639 36.468,7.639 v1(37.084,8.255) ; v1(39.751,12.319) 39.116,12.319 38.84,12.595 38.84,22.699 39.636,23.495 42.545,23.495
  Bottom Layer w0.178: U8.9@42.038,24.365 42.691,24.365 42.799,24.257 v1(42.799,23.495)
  Bottom Layer w0.203: R32.2@18.669,7.068 18.669,6.223 18.796,6.096 v1(18.796,5.715)
PWM: R24.1 U8.15 | length 14.2
  Top Layer w0.178: R24.1@35.687,11.601 v1(35.687,12.065)
  Bottom Layer w0.178: v1(35.687,12.065) 36.248,12.065 37.63,13.448 37.63,20.866 38.735,21.971 38.735,22.987 38.989,23.241 39.243,23.241 ; 39.117,23.24 U8.15@39.713,23.24
RLED: pad.4@37.211,9.652 U8.13 U10.3 | length 15.8
  Bottom Layer w0.178: U10.3@39.515,21.351 39.515,21.862 39.615,21.962 39.844,21.962 40.117,22.234 40.268,22.234 40.513,22.479 U8.13@40.513,23.24
  Bottom Layer w0.254: v1(36.957,9.779) 36.703,10.033 36.703,11.564 38.046,12.907 38.046,20.647 38.75,21.351 U10.3@39.515,21.351
SENAN: C7.1 R7.1 U1.39 | length 4.9
  Bottom Layer w0.203: U1.39@28.858,6.251 29.321,6.251 30.07,5.502 30.142,5.502 30.479,5.166 31.794,5.166 ; C7.1@31.794,4.445 31.794,5.166 ; R7.1@31.877,5.969 31.794,5.886 31.794,5.166
SENBN: C48.1 R43.1 U1.12 | length 4.1
  Bottom Layer w0.208: C48.1@20.403,6.223 20.403,6.687 20.574,6.858 21.247,6.858 ; R43.1@21.253,7.62 21.253,6.864 21.247,6.858 ; U1.12@22.958,6.251 22.28,6.251 21.673,6.858 21.247,6.858
SS1: C18.2 U1.36 | length 2.4
  Bottom Layer w0.254: U1.36@28.858,7.751 29.698,7.751 29.742,7.795 30.202,7.795 30.216,7.781 C18.2@30.944,8.509
SYSHB: R31.2 U8.7 | length 16.9
  Signal Layer 2 w0.178: v1(42.672,26.162) 44.831,26.162 45.212,25.781 46.736,25.781 47.371,25.146 49.53,25.146 49.666,25.01 49.666,23.504 49.53,23.368 46.609,23.368 46.219,22.978 46.219,21.962 v1(45.339,21.082)
  Bottom Layer w0.178: U8.7@42.038,25.165 42.513,25.165 42.799,25.451 v1@42.799,26.035 ; R31.2@44.831,21.126 v1@45.339,21.126
TBST: C69.2 U12.1 | length 1.4
  Bottom Layer w0.508: U12.1@41.472,16.957 41.402,16.887 41.402,16.383 41.529,16.256 C69.2@41.529,15.665
TEMPSEN: C47.2 R29.1 R30.2 U8.6 | length 7.3
  Bottom Layer w0.178: U8.6@42.038,25.565 42.038,26.636 42.199,26.797 43.561,26.797 ; R29.1@43.561,26.079 43.561,26.797 ; R30.2@46.736,27.769 C47.2@45.339,27.769 44.787,27.769 44.577,27.559 44.577,27.051 44.323,26.797 43.561,26.797
TFB: R50.1 R51.2 U12.3 | length 5.9
  Bottom Layer w0.178: R50.1@40.132,15.665 39.453,15.665 39.37,15.748 39.37,18.669 39.541,18.84 40.259,18.84 40.276,18.857 U12.3@41.472,18.857
TGDN1: R10.1 U1.32 | length 37.4
  Signal Layer 2 w0.381: v1(29.972,9.525) 30.78,9.525 33.939,12.684 35.463,12.684 36.76,13.981 36.76,14.975 36.633,15.102 36.633,22.308 36.509,22.433 36.509,24.384 37.338,25.213 37.338,29.083 38.1,29.845 43.561,29.845 43.942,29.464 v1(43.942,27.686)
  Bottom Layer w0.254: U1.32@28.858,9.751 29.746,9.751 v1(29.972,9.525)
  Bottom Layer w0.381: R10.1@42.545,30.309 42.545,29.972 43.942,28.575 v1(43.942,27.686)
TGDN2: R47.1 U1.19 | length 27.1
  Signal Layer 2 w0.381: v1(13.081,27.432) 13.081,25.573 13.646,25.008 13.646,22.422 17.653,18.415 17.653,15.561 20.139,13.075 20.139,10.341 20.686,9.794 v1(22.223,9.794)
  Bottom Layer w0.208: v1(22.223,9.794) 22.267,9.751 U1.19@22.958,9.751
  Bottom Layer w0.381: v1(13.081,27.432) 13.081,29.845 13.97,30.734 R47.1@13.97,31.071
TGUP1: R9.1 U1.33 | length 36.6
  Signal Layer 2 w0.381: v1(29.845,8.763) 30.988,8.763 31.099,8.652 33.557,8.652 37.747,12.842 37.747,23.65 38.481,24.384 38.481,28.448 39.116,29.083 42.926,29.083 43.053,28.956 v1(43.053,27.686)
  Bottom Layer w0.254: U1.33@28.858,9.251 29.322,9.251 29.81,8.763 v1(29.845,8.763)
  Bottom Layer w0.381: R9.1@41.148,30.309 41.573,30.309 41.783,30.099 41.783,29.845 43.053,28.575 v1(43.053,27.686)
TGUP2: R46.1 U1.18 | length 28.4
  Signal Layer 2 w0.381: v1(12.319,27.432) 12.319,25.514 13.065,24.767 13.065,22.114 17.018,18.161 17.018,15.375 19.558,12.835 19.558,9.652 20.309,8.901 v1(21.982,8.901)
  Bottom Layer w0.208: v1(21.982,8.901) 22.054,8.901 22.404,9.251 U1.18@22.958,9.251
  Bottom Layer w0.381: v1(12.319,27.432) 12.319,30.226 12.573,30.48 R46.1@12.573,31.071
TLX: C69.1 L4.2 U12.6
TSEN: R29.2 U8.8 | length 1.7
  Bottom Layer w0.178: U8.8@42.038,24.765 42.672,24.765 43.136,25.229 R29.2@43.561,25.229
VFB: R11.2 R14.2 R17.2 R41.2 U1.38 | length 18.2
  Top Layer w0.208: R14.2@29.127,2.921 29.845,2.921 30.378,3.454 30.378,4.793 30.046,5.124 R17.2@29.083,5.124 29.127,5.168 R11.2@29.127,6.477 v1(29.845,6.477)
  Signal Layer 3 w0.208: v1(21.59,4.064) 21.59,5.461 21.971,5.842 28.321,5.842 28.956,6.477 v1(29.845,6.477)
  Bottom Layer w0.208: R41.2@20.955,4.02 20.999,4.064 v1(21.59,4.064) ; U1.38@28.858,6.751 29.571,6.751 v1(29.845,6.477)
VOP: C46.2 R28.2 U8.10 | length 31.8
  Top Layer w0.178: v1(34.163,5.207) 34.207,5.163 R28.2@34.207,4.699
  Signal Layer 3 w0.178: v1(40.132,8.382) 40.132,9.174 42.007,11.049 43.688,11.049 44.323,11.684 44.323,17.018 46.736,19.431 v1(46.736,22.225)
  Signal Layer 2 w0.178: v1(34.163,5.207) 34.172,5.216 35.977,5.216 37.237,6.477 38.227,6.477 v1(40.132,8.382)
  Bottom Layer w0.178: U8.10@42.038,23.965 U8.10@42.038,23.965 42.037,23.374 42.468,22.943 C46.2@43.561,22.943 44.113,22.943 44.55,22.506 44.55,21.998 44.731,21.817 46.328,21.817 v1(46.736,22.225)
VOUT: C3.1 C4.1 C16.1 C19.2 C20.2 C21.2 C22.2 C23.2 C24.2 C32.2 C33.1 C51.2 C52.2 C53.2 C54.2 C58.2 C66.2 C67.2 D6.1 pad.5 Q1.5 Q1.6 Q1.7 Q1.8 Q3.5 Q3.6 Q3.7 Q3.8 R34.2 R42.1 | length 48.1
  Signal Layer 2 w0.208: v1(16.637,26.035) 16.637,34.29 17.145,34.798 25.908,34.798 26.162,35.052 26.162,36.703 24.892,37.973 C3.1@24.765,37.973 ; v1(31.115,39.243) 30.988,39.116 31.623,39.116 32.131,38.608 32.131,28.702 33.02,27.813 35.56,27.813 v1(35.814,27.559)
  Bottom Layer w0.208: v1(16.637,26.035) 17.907,26.035 18.517,25.425 18.517,21.615 18.796,21.336 18.796,20.32 19.05,20.066 19.431,20.066 19.602,19.895 R42.1@19.602,18.034 ; v1(35.814,27.559) 35.897,27.559 R34.2@36.278,27.94
  other v1: 16.383,37.592 16.891,37.592 17.399,37.592 17.907,37.592 18.415,37.592 18.923,37.592 19.431,37.592 19.939,37.592 32.258,37.592 32.766,37.592 33.274,37.592 33.782,37.592 34.29,37.592 34.798,37.592 35.306,37.592 35.814,37.592 16.383,38.1 16.891,38.1 17.399,38.1 17.907,38.1 18.415,38.1 18.923,38.1 19.431,38.1 19.939,38.1 32.258,38.1 32.766,38.1 33.274,38.1 33.782,38.1 34.29,38.1 34.798,38.1 35.306,38.1 35.814,38.1 16.383,38.608 16.891,38.608 17.399,38.608 17.907,38.608 18.415,38.608 18.923,38.608 19.431,38.608 19.939,38.608 32.258,38.608 32.766,38.608 33.274,38.608 33.782,38.608 34.29,38.608 34.798,38.608 35.306,38.608 35.814,38.608 16.383,39.116 16.891,39.116 17.399,39.116 17.907,39.116 18.415,39.116 18.923,39.116 19.431,39.116 19.939,39.116 32.766,39.116 33.274,39.116 33.782,39.116 34.29,39.116 34.798,39.116 35.306,39.116 21.717,39.243 22.225,39.243 22.733,39.243 23.241,39.243 23.749,39.243 24.257,39.243 24.765,39.243 25.273,39.243 25.781,39.243 26.289,39.243 28.575,39.243 29.083,39.243 29.591,39.243 30.099,39.243 30.607,39.243 31.623,39.243 32.131,39.243 16.383,39.624 16.891,39.624 17.399,39.624 17.907,39.624 18.415,39.624 18.923,39.624 32.766,39.624 33.274,39.624 33.782,39.624 34.29,39.624 34.798,39.624 21.717,39.751 22.225,39.751 22.733,39.751 23.241,39.751 23.749,39.751 24.257,39.751 24.765,39.751 25.273,39.751 25.781,39.751 26.289,39.751 26.797,39.751 27.432,39.751 28.067,39.751 28.575,39.751 29.083,39.751 29.591,39.751 30.099,39.751 30.607,39.751 31.115,39.751 31.623,39.751 32.131,39.751 16.383,40.132 16.891,40.132 17.399,40.132 17.907,40.132 18.415,40.132 18.923,40.132 32.766,40.132 33.274,40.132 33.782,40.132 34.29,40.132 34.798,40.132 22.225,40.259 22.733,40.259 23.241,40.259 23.749,40.259 24.257,40.259 24.765,40.259 25.273,40.259 25.781,40.259 26.289,40.259 26.797,40.259 27.432,40.259 28.067,40.259 28.575,40.259 29.083,40.259 29.591,40.259 22.733,40.767 23.241,40.767 23.749,40.767 24.257,40.767 24.765,40.767 25.273,40.767 25.781,40.767 26.289,40.767 26.797,40.767 27.432,40.767 28.067,40.767 28.575,40.767 29.083,40.767 22.733,41.275 23.241,41.275 23.749,41.275 24.257,41.275 24.765,41.275 25.273,41.275 25.781,41.275 26.289,41.275 26.797,41.275 27.432,41.275 28.067,41.275 28.575,41.275 29.083,41.275 22.733,41.783 23.241,41.783 23.749,41.783 24.257,41.783 24.765,41.783 25.273,41.783 25.781,41.783 26.289,41.783 26.797,41.783 27.305,41.783 27.813,41.783 28.321,41.783 28.829,41.783 22.733,42.291 23.241,42.291 23.749,42.291 24.257,42.291 24.765,42.291 25.273,42.291 25.781,42.291 26.289,42.291 26.797,42.291 27.305,42.291 27.813,42.291 28.321,42.291 28.829,42.291
VREF: R15.1 U9.3 U9.4 | length 3.6
  Top Layer w0.178: U9.3@31.735,8.11 U9.4@31.735,5.86 31.735,5.222 31.877,5.08 R15.1@31.877,4.616
pads on no net: U1.16 U1.35 U4.2 U7.2 U8.17 U10.4

## Polygon pours and split planes (outlines as drawn)
GND on Bottom Layer "Component Side-No Net 1" (solid, remove dead copper, pour order 250): 35.941,1.905 36.195,2.159 36.195,11.049 40.317,11.049 40.369,10.997 41.402,9.964 41.402,4.826